# EAGLE board Switch-board (EAGLE 8.3.2)
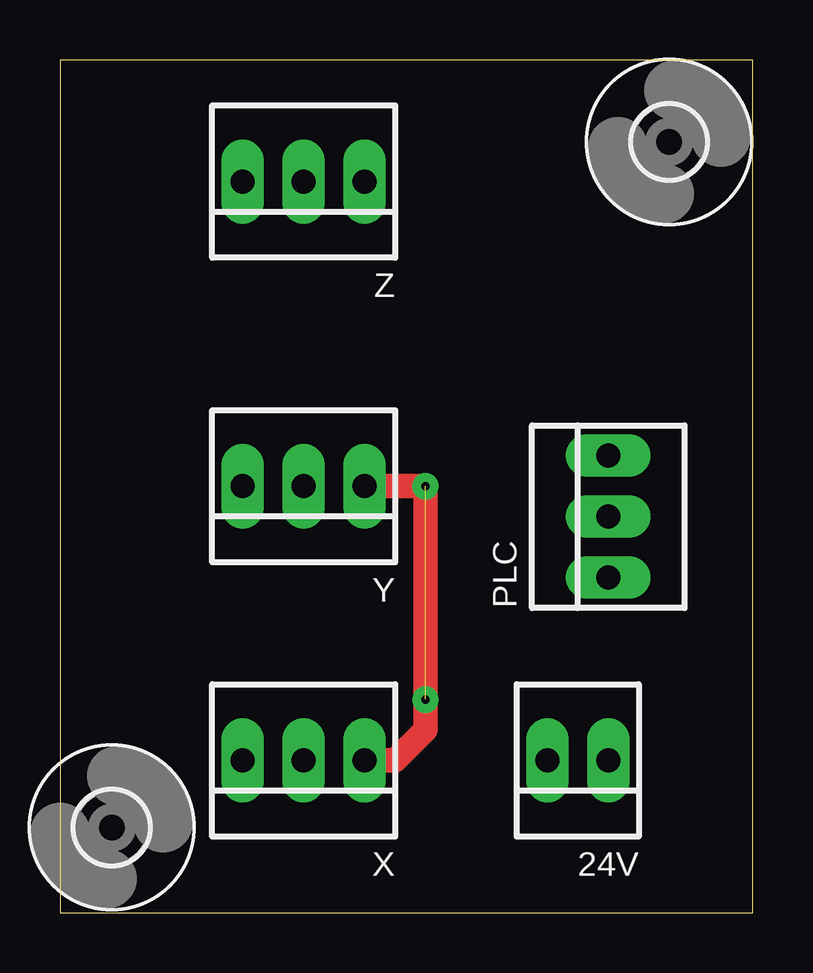
[diagram p0: board, top side]
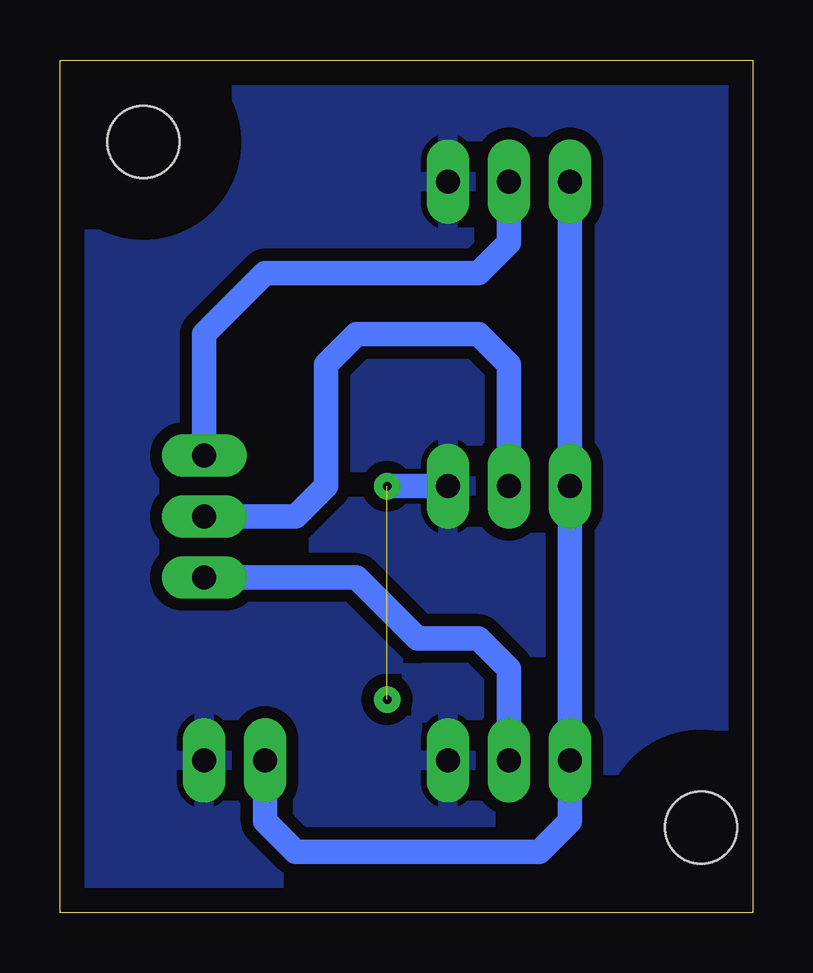
[diagram p1: board, bottom side, seen from below]

Size 28.88 x 35.55 mm. Coordinates in mm from the lower left corner, seen from the top.
Outline: 0,0 28.88,0 28.88,35.55 0,35.55 0,0
Copper layers (1*16): Top 0.035mm / dielectric 1.5mm / Bottom 0.035mm
Design rules "default *": minimum track width 15mil, minimum drill 0.4mm, track to track 20mil, track to pad 20mil, pad to pad 6mil, via to via 6mil, smd to smd 6mil, copper to edge 40mil, drill to drill 6mil, minimum pad ring 15mil, minimum via ring 8mil, stop-mask expansion 4mil, vias tented up to drill 0mil, thermal gap 10mil

## Footprints (pad centres in the part's own frame; a part is rotated, then mirrored left to right if it is on the bottom)
22-23-2021 = drill 1 long: 1 -1.27,0; 2 1.27,0
22-23-2031 = drill 1 long: 1 -2.54,0; 2 0,0; 3 2.54,0
3,0 = hole 3: 0,0

## Placement (x,y rotation side)
24V  22-23-2021  [22-23-2021]  21.59,6.35 180 top
PLC  22-23-2031  [22-23-2031]  22.86,16.51 90 top
U$1  [3,0]  25.4,32.13 0 top
U$2  [3,0]  2.16,3.56 0 top
X  22-23-2031  [22-23-2031]  10.16,6.35 180 top
Y  22-23-2031  [22-23-2031]  10.16,17.78 180 top
Z  22-23-2031  [22-23-2031]  10.16,30.48 180 top

## Library data of the parts
24V = con-molex; MF: MOLEX; MPN: 22-23-2021; OC_FARNELL: 1462926; OC_NEWARK: 25C3832
PLC X Y Z = con-molex; MF: MOLEX; MPN: 22-23-2031; OC_FARNELL: 1462950; OC_NEWARK: 30C0862
U$1 U$2 = holes

## Nets
GND: 24V.1 X.1 Y.1 Z.1
N$1: PLC.1 X.2
N$3: PLC.2 Y.2
N$5: PLC.3 Z.2
VCC: 24V.2 X.3 Y.3 Z.3

## Tracks (layer width: path | path; a pad name or v marks a point on that pad's centre or on a via)
GND
  Top 1.016: Y.1 15.24,17.78 15.24,7.62 13.97,6.35 X.1
  Bottom 1.016: Y.1 15.24,17.78
  pour Bottom: -1.27,36.83 30.48,36.83 30.48,-1.27 -1.27,-1.27
N$1
  Bottom 1.016: X.2 10.16,10.16 11.43,11.43 13.97,11.43 16.51,13.97 PLC.1
N$2  (via drill 0.35 pad 1.1)  (1 unrouted)
  other vias: 15.24,17.78 15.24,8.89
N$3
  Bottom 1.016: PLC.2 19.05,16.51 17.78,17.78 17.78,22.86 16.51,24.13 11.43,24.13 10.16,22.86 Y.2
N$5
  Bottom 1.016: PLC.3 22.86,24.13 20.32,26.67 11.43,26.67 10.16,27.94 Z.2
VCC
  Bottom 1.016: Z.3 Y.3 X.3 7.62,3.81 8.89,2.54 19.05,2.54 20.32,3.81 24V.2